# Altium PCB pcbBoard.PcbDoc
Units mm, origin at the board's own origin, x right, y up, seen from the top; angles counter-clockwise.
Board outline 67 x 67 mm, 2 copper layers (Top Layer, Bottom Layer), stack 1.569 mm thick; 46 components, 42 nets, 229 pads, 71 vias.
Unrouted connection lines stored in the file: 1.
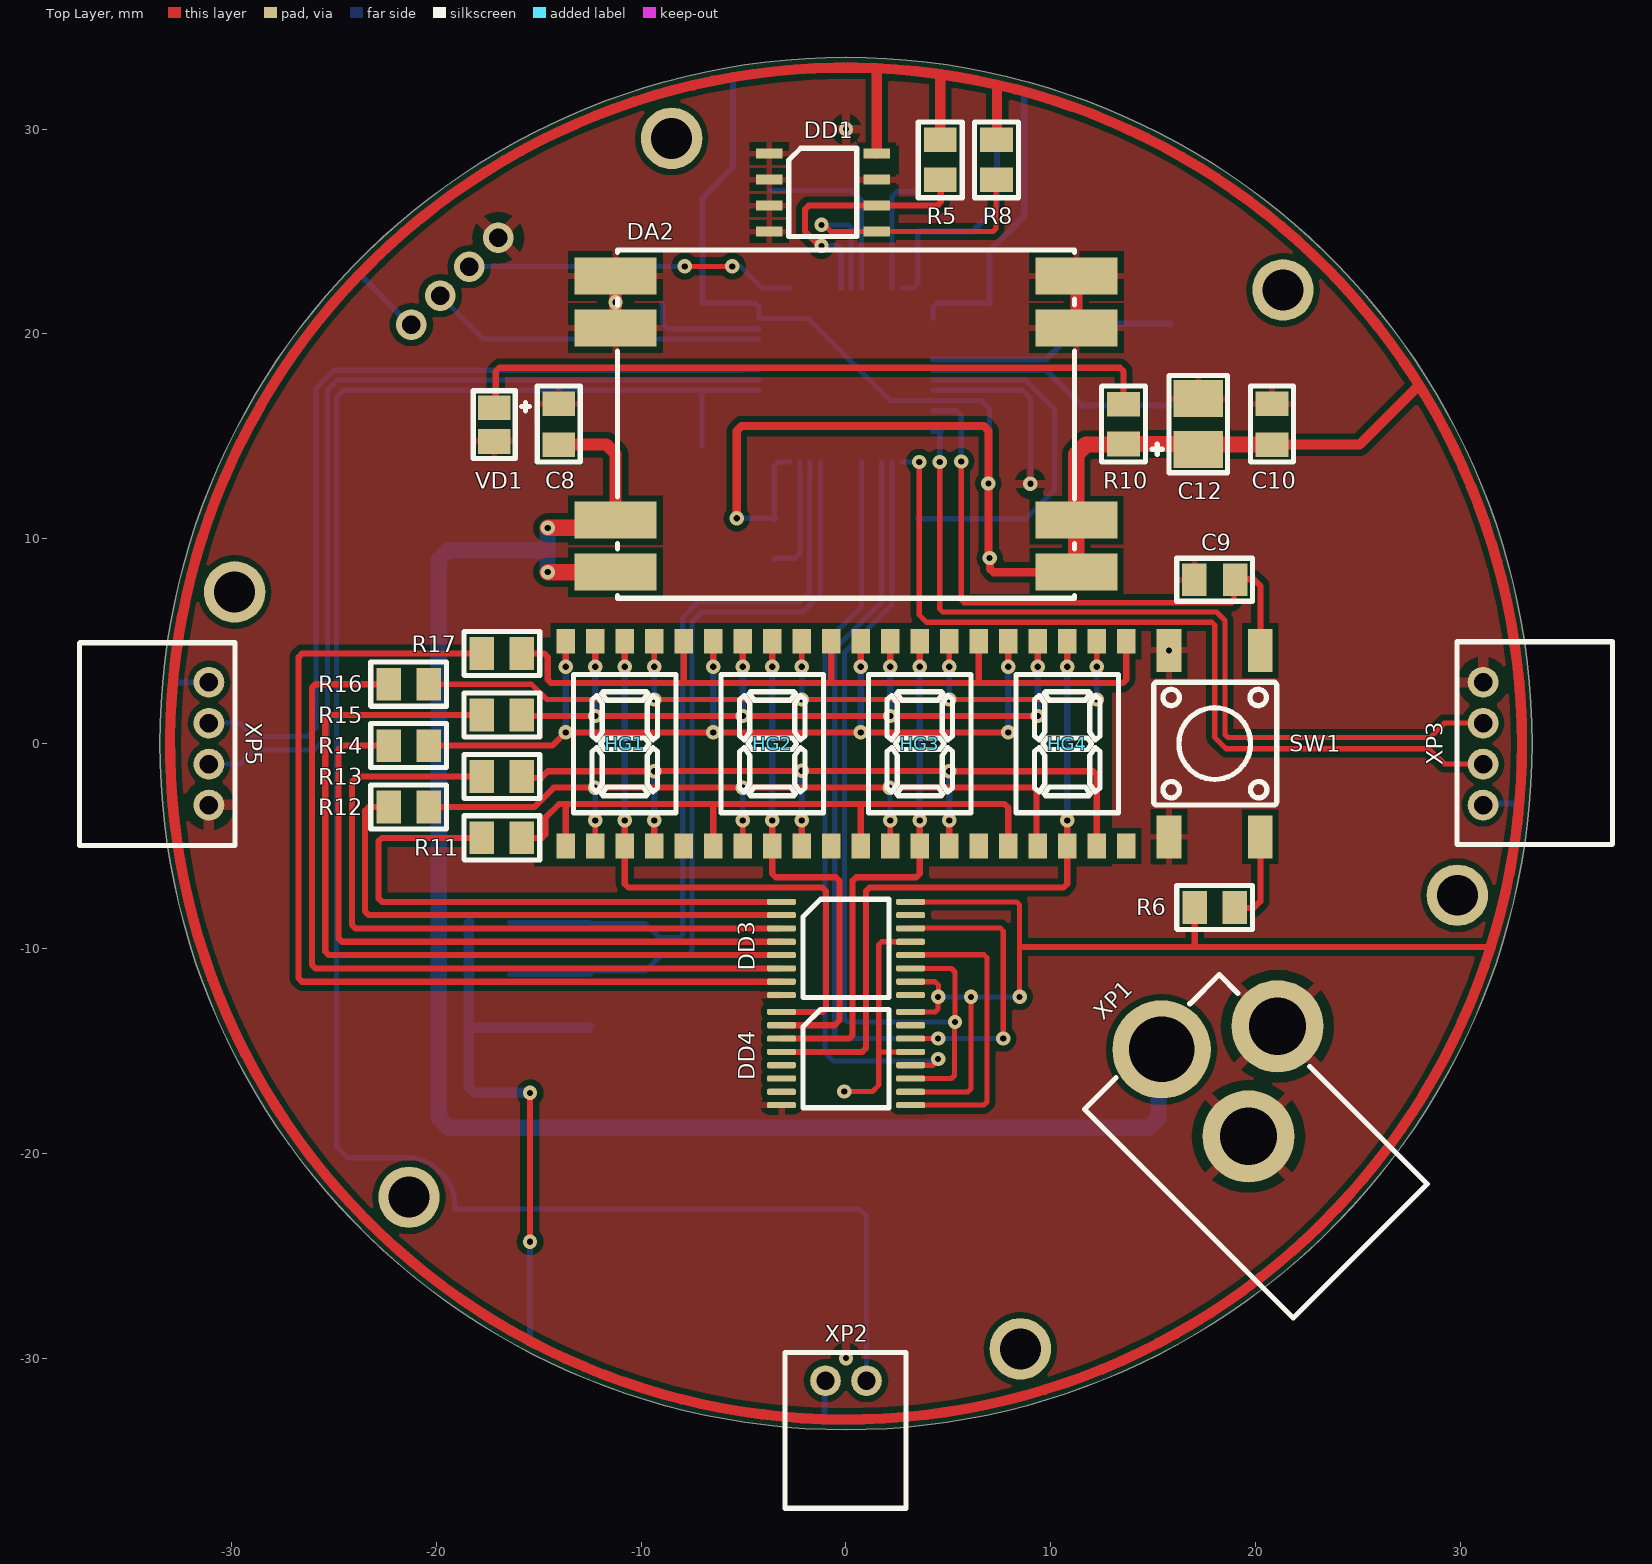
[diagram p0: Top Layer view]
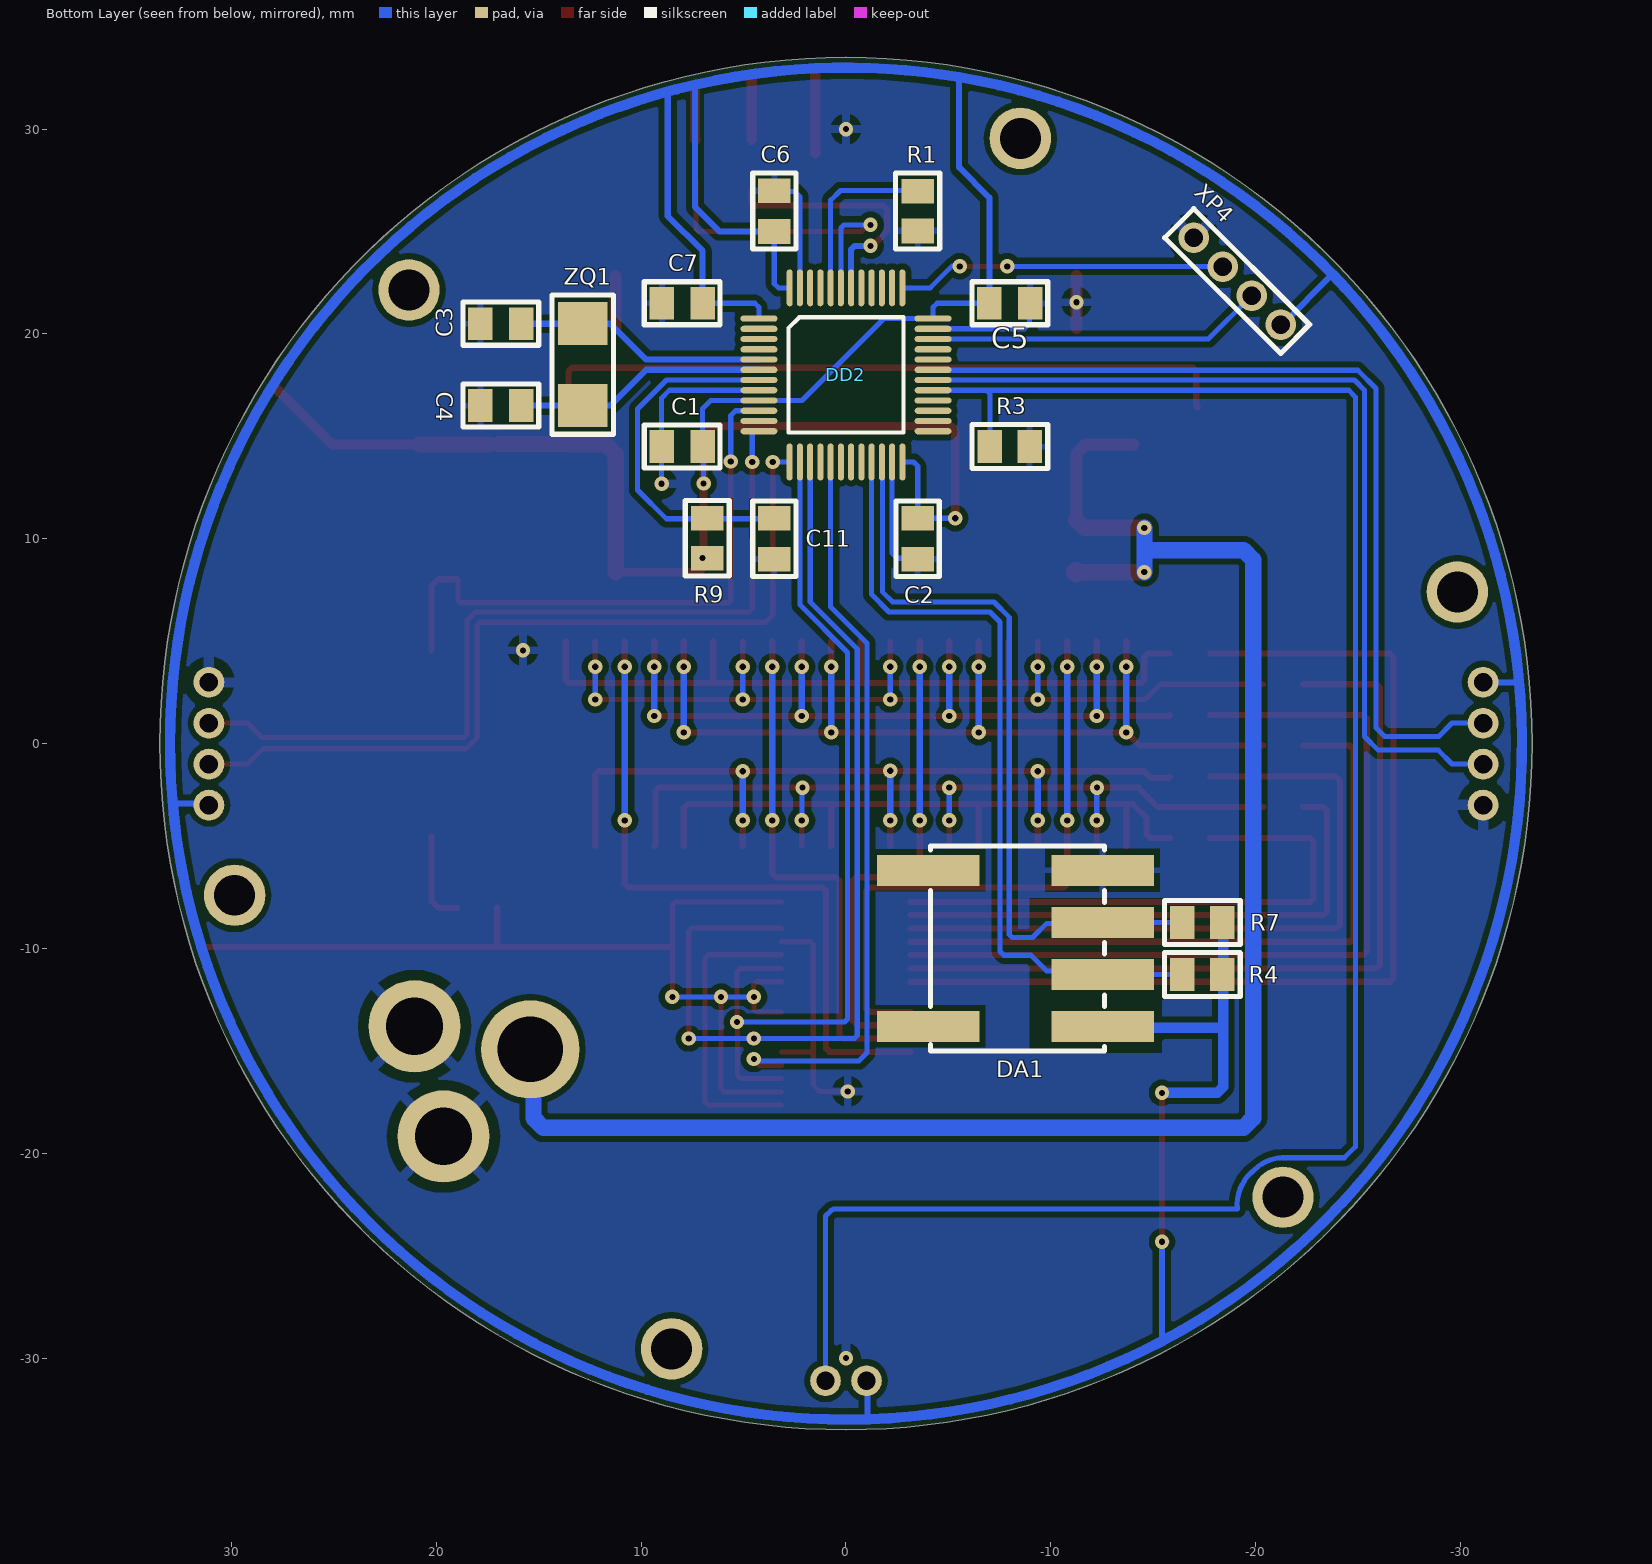
[diagram p1: Bottom Layer view, seen from below]
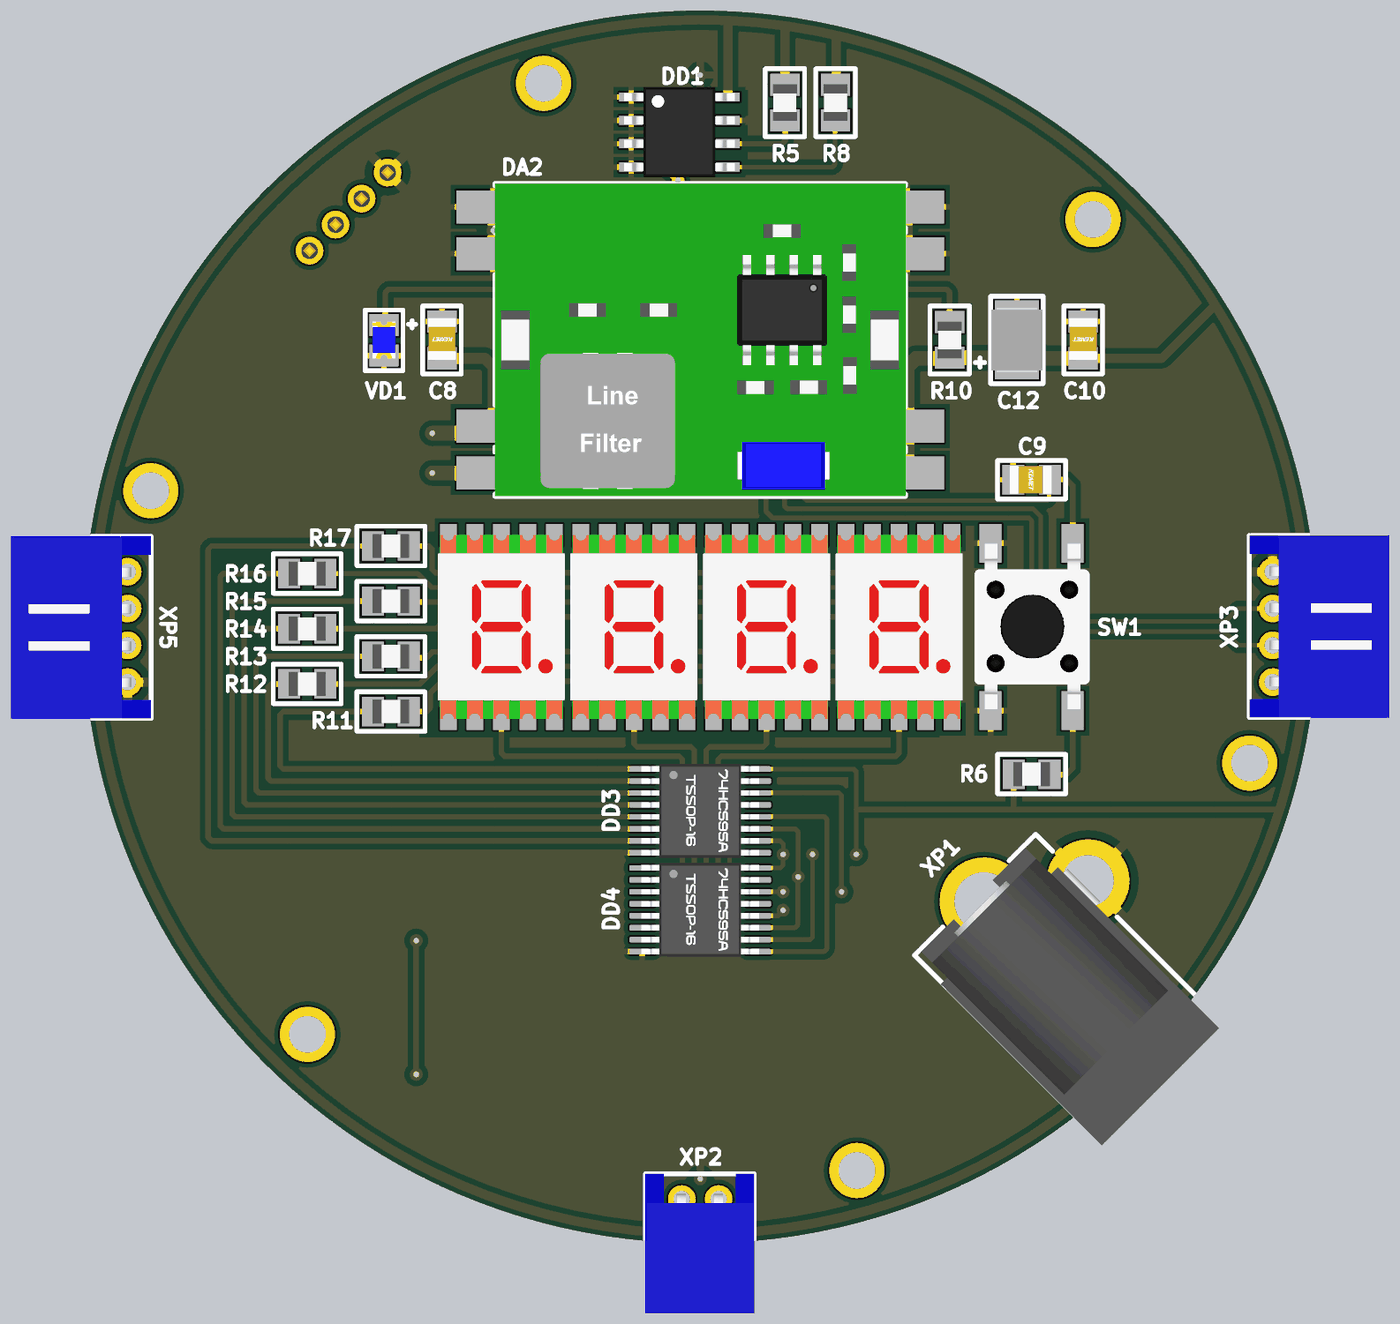
[diagram p2: 3D render of the assembled board from above, using the file's embedded part models]
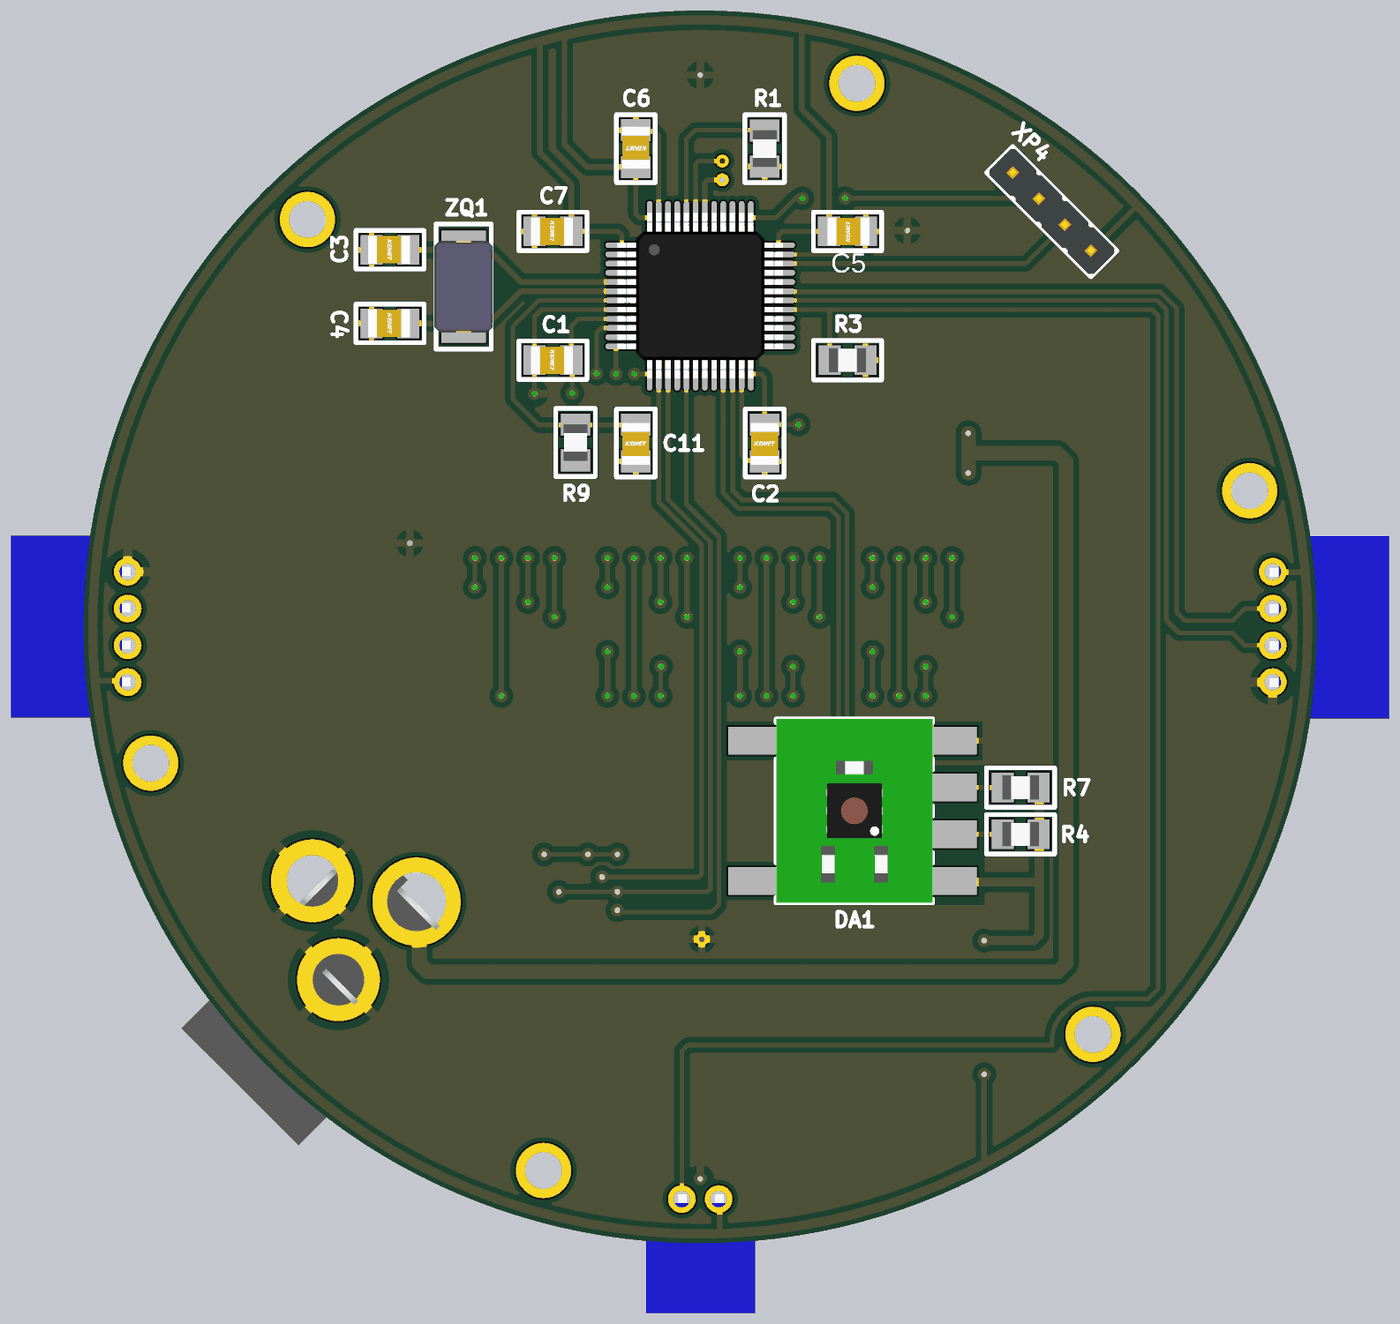
[diagram p3: 3D render of the assembled board from below, using the file's embedded part models]

## Layer stack, top to bottom
Top Solder: solder mask 0.0254, SM-001, Dk 4
Top Layer: signal copper 0.035
Dielectric 1: core 1.4986, Core-043, Dk 4.3
Bottom Layer: signal copper 0.035
Bottom Solder: solder mask 0.0254, SM-001, Dk 4

## Board outline
0,-33.5 cw(c0,0) -33.5,0 cw(c0,0) 0,33.5 cw(c0,0) 33.5,0 cw(c0,0)

## Design rules (kind name [scope] priority, off if disabled: settings)
Clearance [All] p1: gap=0.3 ignorepadtopadclearanceinfootprint=FALSE except(0.2: Arc-Arc Arc-Track Arc-SMDPad Track-Track Track-SMDPad SMDPad-SMDPad)
PolygonConnect [All] p1: thpad.connectstyle=Relief thpad.reliefconductorwidth=0.5 thpad.reliefentries=4 thpad.polygonreliefangle="90 Angle" thpad.airgapwidth=0.5 smdpad.connectstyle=Relief smdpad.reliefconductorwidth=0.3 smdpad.reliefentries=4 smdpad.polygonreliefangle="90 Angle" smdpad.airgapwidth=0.3 via.connectstyle=Relief via.reliefconductorwidth=0.4 via.reliefentries=4 via.polygonreliefangle="90 Angle" via.airgapwidth=0.4
RoutingVias [All] p1: holewidth=0.711 width=1.27 viastyle="Through Hole" minholewidth=0.711 minwidth=1.27 maxholewidth=0.711 maxwidth=1.27
SolderMaskExpansion [All] p1: expansion=0.102 istentingtop=FALSE
Width [All] p1: maxlimit=1 minlimit=0.25 preferedwidth=0.3
30 further rules are at their usual default settings.

## Components (designator, comment, footprint, x,y, rotation, side; value= is the part's Value field where it differs from the comment)
C1 "100nF" 0805#1 8,14.5 r180 bottom
C2 "100nF" 0805#1 -3.5,10 r90 bottom
C3 "22pF" 0805#1 16.85,20.5 r180 bottom
C4 "22pF" 0805#1 16.85,16.5 r180 bottom
C5 "100nF" 0805#1 -8,21.5 r0 bottom
C6 "100nF" 0805#1 3.5,26 r270 bottom
C7 "100nF" 0805#1 8,21.5 r180 bottom
C8 "100nF" 0805#1 -14.025,15.6 r270 top
C9 "100nF" 0805#1 18,8 r0 top
C10 "100nF" 0805#2 20.8,15.6 r270 top
C11 "100nF" 0805#1 3.5,10 r90 bottom
C12 "47uF" smdB 17.2,15.6 r90 top
DA1 "Si7021" Si7021-Board -8.275,-10 r0 bottom
DA2 "MP2363DN" MP2363DN 0,15.6 r0 top
DD1 "FM24CL64B" SOIC-8 -1.125,26.9 r0 top
DD2 "Component_1" QUAD48 0,18 r180 bottom
DD3 "74HC595_L" 74HC595 0,-10 r0 top
DD4 "74HC595_S" 74HC595 0,-15.375 r0 top
HG1 "7-Segment" TOS-F2101AMRL-N-1-HF -10.8,0 r0 top locked
HG2 "7-Segment" TOS-F2101AMRL-N-1-HF -3.6,0 r0 top locked
HG3 "7-Segment" TOS-F2101AMRL-N-1-HF 3.6,0 r0 top locked
HG4 "7-Segment" TOS-F2101AMRL-N-1-HF 10.8,0 r0 top locked
R1 "4.7KОм" "RES: 0.25w" -3.5,26 r270 bottom
R3 "4.7KОм" "RES: 0.25w" -8,14.5 r0 bottom
R4 "4.7KОм" "RES: 0.25w" -17.4,-11.27 r180 bottom
R5 "4.7KОм" "RES: 0.25w" 4.6,28.5 r90 top
R6 "4.7KОм" "RES: 0.25w" 18,-8 r180 top
R7 "4.7KОм" "RES: 0.25w" -17.4,-8.73 r180 bottom
R8 "4.7KОм" "RES: 0.25w" 7.35,28.5 r90 top
R9 "4.7KОм" "RES: 0.25w" 6.775,10.025 r270 bottom
R10 "470Ом" "RES: 0.25w" 13.55,15.6 r90 top
R11 "470Ом" "RES: 0.25w" -16.8,-4.6 r180 top
R12 "470Ом" "RES: 0.25w" -21.35,-3.1 r180 top
R13 "470Ом" "RES: 0.25w" -16.8,-1.6 r180 top
R14 "470Ом" "RES: 0.25w" -21.35,-0.1 r180 top
R15 "470Ом" "RES: 0.25w" -16.8,1.4 r180 top
R16 "470Ом" "RES: 0.25w" -21.35,2.9 r180 top
R17 "470Ом" "RES: 0.25w" -16.8,4.4 r180 top
SW1 "Switch" Button 18,0 r90 top
VD1 "Diode" TO-1608BC-BF -17.175,15.6 r270 top
XP1 "X2" DS-261A 19.65,-19.175 r315 top
XP2 "X2" WB-02 0,-31.1 r0 top
XP3 "X4" WB-04 31.1,0 r90 top
XP4 "X4" PLS-4 -19.1,22.575 r45 bottom
XP5 "X4" WB-04 -31.1,0 r270 top
ZQ1 "HC-49SM" HC-49SM 12.85,18.5 r270 bottom

## Footprints (in the part's own frame and the unit in brackets; to place one, negate y for a bottom-side part, rotate by r counter-clockwise, add the part's x,y. Pads: shape width x height; smd on the part's side, far side on the other; paste and mask are expansions set on the pad)
74HC595 [mm]
  rrect50% 1.4x0.3 smd: 1(-3.15,2.275) 2(-3.15,1.625) 3(-3.15,0.975) 4(-3.15,0.325) 5(-3.15,-0.325) 6(-3.15,-0.975) 7(-3.15,-1.625) 8(-3.15,-2.275) 9(3.15,-2.275) 10(3.15,-1.625) 11(3.15,-0.975) 12(3.15,-0.325) 13(3.15,0.325) 14(3.15,0.975) 15(3.15,1.625) 16(3.15,2.275)
  silkscreen extent -2.1,-2.4 2.1,2.4, body extent -3.2,-2.55 3.2,2.55, height 1.2
0805#1 [mm]
  rect 1.2x1.6 smd mask+0.102: 1(-1,0)
  rect 1.2x1.6 smd: 2(1,0)
  silkscreen extent -1.85,-1.05 1.85,1.05, body extent -1.2,-0.77 1.1,0.78, height 1
0805#2 [mm]
  rect 1.2x1.6 smd: 1(-1,0) 2(1,0)
  silkscreen extent -1.85,-1.05 1.85,1.05, body extent -1.2,-0.78 1.1,0.78, height 1
Button [mm]
  rect 2.1x1.2 smd: 1(-4.55,2.23) 1(4.55,2.23) 2(-4.55,-2.23) 2(4.55,-2.23)
  silkscreen extent -3,-3.02 3,2.98, body extent -4.47,-3.04 4.53,2.96, height 9.5
DS-261A [mm]
  round 4.8 hole 3.2: 1(-6,0)
  round 4.5 hole 2.8: 2(-2.8,4.8) 2(0,0)
  silkscreen extent -6.6,-4.73 7.81,4.58, body extent -6.5,-4.84 7.9,4.46, height 11.1
HC-49SM [mm]
  rect 2.1x2.4 smd: 1(-2,0) 2(2,0)
  silkscreen extent -3.4,-1.5 3.4,1.5, body extent -2.5,-1.6 2.5,1.6, height 1.3
MP2363DN [mm]
  rect 4x1.8 smd: 1(-11.25,-7.23) 1(-11.25,-4.69) 2(-11.25,4.69) 2(-11.25,7.23) 3(11.25,-7.23) 3(11.25,-4.69) 4(11.25,4.69) 4(11.25,7.23)
  silkscreen extent -11.15,-8.5 11.15,8.5, body extent -11.15,-8.5 11.15,8.5, height 5.8
PLS-4 [mm]
  round 1.5 hole 0.9: 1(-3,0) 2(-1,0) 3(1,0) 4(3,0)
  silkscreen extent -4,-1 4,1, body extent -4,-1 4,1, height 6
QUAD48 [mm]
  oval 1.8x0.3 smd: 1(-4.25,2.75) 2(-4.25,2.25) 3(-4.25,1.75) 4(-4.25,1.25) 5(-4.25,0.75) 6(-4.25,0.25) 7(-4.25,-0.25) 8(-4.25,-0.75) 9(-4.25,-1.25) 10(-4.25,-1.75) 11(-4.25,-2.25) 12(-4.25,-2.75) 25(4.25,-2.75) 26(4.25,-2.25) 27(4.25,-1.75) 28(4.25,-1.25) 29(4.25,-0.75) 30(4.25,-0.25) 31(4.25,0.25) 32(4.25,0.75) 33(4.25,1.25) 34(4.25,1.75) 35(4.25,2.25) 36(4.25,2.75)
  oval 0.3x1.8 smd: 13(-2.75,-4.25) 14(-2.25,-4.25) 15(-1.75,-4.25) 16(-1.25,-4.25) 17(-0.75,-4.25) 18(-0.25,-4.25) 19(0.25,-4.25) 20(0.75,-4.25) 21(1.25,-4.25) 22(1.75,-4.25) 23(2.25,-4.25) 24(2.75,-4.25) 37(2.75,4.25) 38(2.25,4.25) 39(1.75,4.25) 40(1.25,4.25) 41(0.75,4.25) 42(0.25,4.25) 43(-0.25,4.25) 44(-0.75,4.25) 45(-1.25,4.25) 46(-1.75,4.25) 47(-2.25,4.25) 48(-2.75,4.25)
  silkscreen extent -2.81,-2.81 2.81,2.81, body extent -4.5,-4.5 4.5,4.5, height 1.5
"RES: 0.25w" [mm]
  rect 1.2x1.6 smd: 1(-0.975,0) 2(0.975,0)
  silkscreen extent -1.85,-1.07 1.85,1.07, body extent -1,-0.65 1,0.65, height 0.73
Si7021-Board [mm]
  rect 5x1.5 smd: 1(-4.25,3.81) 2(-4.25,1.27) 3(-4.25,-1.27) 4(-4.25,-3.81) 5(4.25,3.81) 6(4.25,-3.81)
  silkscreen extent -4.35,-5 4.15,5, body extent -4.35,-5 4.15,5, height 2.36
smdB [mm]
  rect 1.8x2.4 smd: 1(-1.25,0) 2(1.25,0)
  silkscreen extent -2.37,-1.43 2.37,2.25, body extent -1.75,-1.4 1.75,1.4, height 2
SOIC-8 [mm]
  rect 1.3x0.5 smd: 1(-2.631,1.905) 2(-2.631,0.635) 3(-2.631,-0.635) 4(-2.631,-1.905) 5(2.631,-1.905) 6(2.631,-0.635) 7(2.631,0.635) 8(2.631,1.905)
  silkscreen extent -1.67,-2.15 1.65,2.17, body extent -3,-2.45 3,2.45, height 1.75
TO-1608BC-BF [mm]
  rect 1.2x1.6 smd: 1(-0.8,0) 2(0.85,0)
  silkscreen extent -1.63,-1.02 1.68,1.73, body extent -1,-0.63 1,0.62, height 1.1
TOS-F2101AMRL-N-1-HF [mm]
  rect 0.9x1.2 smd: 1(-2.88,-5) 2(-1.44,-5) 3(0,-5) 3(0,5) 4(1.44,-5) 5(2.88,-5) 6(-2.88,5) 7(-1.44,5) 9(1.44,5) 10(2.88,5)
  silkscreen extent -2.5,-3.37 2.5,3.37, body extent -3.45,-5 3.45,5, height 3.75
WB-02 [mm]
  round 1.5 hole 0.9: 1(-1,0) 2(1,0)
  silkscreen extent -2.98,-6.22 2.93,1.38, body extent -2.98,-6.23 2.93,1.37, height 4.8
WB-04 [mm]
  round 1.5 hole 0.9: 1(-3,0) 2(-1,0) 3(1,0) 4(3,0)
  silkscreen extent -4.92,-6.32 4.97,1.28, body extent -4.92,-6.32 4.97,1.27, height 4.9

## Part data
C1 C2 C5 C6 C7 C8 C9 C10 C11: library part "CAP: 100nF"
C3 C4: library part "CAP: 22pF"
C12: library part "ECAP: 47uF 10V"
R1 R3 R4 R5 R6 R7 R8 R9 R10 R11 R12 R13 R14 R15 R16 R17: library part Resistor

## Free pads (board coordinates)
  round 3 hole 2: 1(-29.846,7.403) 1(-21.334,-22.146) 1(-8.512,29.548) 1(8.512,-29.548) 1(21.334,22.146) 1(29.846,-7.403)

## Via types
v1: diameter 0.7, hole 0.3, Top Layer to Bottom Layer, tented both sides, 68 vias
v2: diameter 0.7, hole 0.3, Top Layer to Bottom Layer, 3 vias

## Nets (pads, with @x,y where several pads share a name; then routed paths per layer and width w, separated by ;. In a path a pad name is that pad's centre, name@x,y a point inside that pad or via, vN(x,y) a via of type N, cw(c..) or ccw(c..) an arc to the next point about the centre after c; other vN are vias at no path point)
+3.3V: C1.2 C2.2 C5.2 C6.2 C7.2 C10.2 C12.1 DA1.1 DA2.3 DD1.8 DD2.1 DD2.9 DD2.24 DD2.36 DD2.48 DD3.10 DD3.16 DD4.10 DD4.16 R4.2 R5.2 R6.2 R7.2 R8.2 R9.2 R10.1 XP2.1 XP3.1 XP4.1 XP5.1 | length 629.2
  Top Layer w0.25: DD4.10 5.954,-17 6.1,-16.854 v1(6.1,-12.365) ; DD4.16 4.354,-13.1 4.5,-12.954 v1(4.5,-12.365) ; DD3.10 4.35,-11.625 4.525,-11.8 v1@4.525,-12.275 ; DD3.16 8.329,-7.725 8.475,-7.871 v1(8.475,-12.365) ; 17.025,-9.921 17.033,-9.929
  Top Layer w0.3: v1(-15.425,-24.32) -15.434,-24.311 -15.434,-17.059 v1(-15.425,-17.05) ; 8.491,-9.929 17.033,-9.929 31.471,-9.929 ; 17.025,-9.921 R6.2
  Top Layer w0.4: v1(-5.337,11) -5.337,15.267 -5.103,15.501 6.727,15.501 6.961,15.267 6.961,9.058 7.032,8.987 7.032,8.534 7.195,8.37 DA2.3@11.25,8.37
  Top Layer w0.5: DD1.8 1.506,32.944 1.482,32.967 ; R5.2 4.6,32.675 ; R8.2 7.375,29.5 7.375,32.125 ; C10.2 25.075,14.6 27.95,17.475 ; 1.482,32.967 ccw(c0,0) -15.466,-29.151 ccw(c0,0) 31.471,-9.929 ccw(c0,0) 33,0 ccw(c0,0) 27.714,17.914 ccw(c0,0) 1.482,32.967
  Top Layer w0.8: DA2.3@11.25,8.37 11.25,10.91 11.25,14.131 11.719,14.6 13.525,14.6 R10.1 C12.1@16.925,14.625 ; C12.1@17.45,14.6 C10.2
  Bottom Layer w0.25: C5.2 -4.45,21.5 -4.25,21.3 DD2.36@-4.25,20.863 ; v1(-5.337,11) C2.2 -3.5,13.55 -3.3,13.75 DD2.24 ; DD2.36 -1.85,20.75 2.15,16.75 DD2.9 6.6,16.75 7,16.35 C1.2 6.95,14.45 v1(6.95,12.7) ; DD2.48 3.3,22.25 3.5,22.45 C6.2 ; DD2.1 4.25,21.3 4.45,21.5 C7.2 ; v1(4.5,-12.365) v1(6.1,-12.365) v1(8.475,-12.365) ; R9.2 R9.2@6.8,9.025
  Bottom Layer w0.3: -32.864,2.975 XP5.1@-31.125,2.975 ; -23.751,22.911 XP4.1@-21.293,20.454 ; v1@-15.651,-24.32 -15.421,-24.55 -15.421,-29.175 ; C5.2 -7,26.65 -5.519,28.131 -5.519,32.535 ; -1.05,-32.983 XP2.1@-1.05,-31.15 ; C6.2 6.175,25 7.375,26.2 7.375,32.075 ; C7.2 7,24.05 8.7,25.75 8.7,31.675 ; XP3.1@31.175,-2.925 32.87,-2.925
  Bottom Layer w0.5: XP5.1@-31.125,2.975 XP5.1 ; XP4.1@-21.293,20.454 XP4.1 ; R7.2 -18.415,-8.77 -18.415,-11.23 R4.2 -18.415,-11.31 -18.415,-13.87 ; v1(-15.425,-17.05) -18.122,-17.05 -18.415,-16.757 -18.415,-13.87 ; DA1.1 -12.585,-13.87 -18.415,-13.87 ; XP2.1@-1.05,-31.15 XP2.1 ; XP3.1 XP3.1@31.175,-2.925 ; -23.751,22.911 ccw(c0,0) -15.466,-29.151 ccw(c0,0) 31.471,-9.929 ccw(c0,0) 33,0 ccw(c0,0) 27.714,17.914 ccw(c0,0) 1.482,32.967 ccw(c0,0) -5.519,32.535 ccw(c0,0) -23.751,22.911
  other v1: 7.012,9.058
BOOT0: DD2.44 R1.1 | length 8.9
  Bottom Layer w0.25: R1.1@-3.693,27 0.275,27 0.75,26.525 DD2.44
DS: DD2.17 DD4.12 | length 36.7
  Top Layer w0.25: DD4.12 4.251,-15.7 4.451,-15.5 v1@4.5,-15.5
  Bottom Layer w0.25: DD2.17 0.75,6.675 -1.025,4.9 -1.025,-15.098 -0.623,-15.5 2.114,-15.5 v1@4.5,-15.5
  other v1: 4.5,-15.4
GND: C1.1 C2.1 C3.1 C4.1 C5.1 C6.1 C7.1 C8.1 C9.1 C10.1 C11.1 C12.2 DA1.4 DA2.2 DA2.4 DD1.1 DD1.2 DD1.3 DD1.4 DD1.7 DD2.8 DD2.23 DD2.35 DD2.47 DD3.8 DD3.13 DD4.8 DD4.13 R1.2 R3.1 SW1.1 VD1.2 XP1.2 XP3.4 XP4.4 XP5.4 | length 43.5
  Top Layer w0.25: v2(-0.088,-16.981) 1.294,-16.981 1.6,-16.675 1.6,-15.055 ; DD4.13 1.605,-15.05 1.6,-15.055 ; DD3.13 1.746,-9.675 1.6,-9.821 1.6,-15.055
  Top Layer w0.6: DA2.2@-11.25,20.29 DA2.2@-11.25,22.83 ; DA2.4@11.25,20.29 DA2.4@11.25,22.83
  Bottom Layer w0.25: C5.1 -8.95,21.45 -8.95,20.5 -8.7,20.25 DD2.35 ; C2.1 -3.45,9.05 -2.5,9.05 -2.25,9.3 DD2.23 ; DD2.47 2.25,26.7 2.5,26.95 3.45,26.95 C6.1 ; DD2.8 8.625,17.25 9,16.875 9,12.72 v1@8.969,12.689
  other v1: 0,-30 15.77,4.55 9,12.689 -11.25,21.546 0,30
NetC8_2: C8.2 DA2.1 XP1.1 | length 86.8
  Top Layer w0.6: C8.2 -11.7,14.6 -11.25,14.15 DA2.1@-11.25,10.91
  Top Layer w0.8: v1(-14.558,8.37) DA2.1@-11.251,8.371 ; v1(-14.558,10.531) -14.553,10.536 -11.624,10.536 DA2.1@-11.25,10.91
  Bottom Layer w0.8: v1@-14.575,8.37 -14.575,9.45 ; v1@-14.575,10.531 -14.575,9.45 ; XP1.1 15.256,-15.084 15.256,-18.281 14.787,-18.75 -19.406,-18.75 -19.875,-18.281 -19.875,8.98 -19.406,9.449 -14.577,9.449 -14.575,9.45
NetDD3_1: DD3.1 R11.2 | length 27.6
  Top Layer w0.3: R11.2 -22.649,-4.6 -22.825,-4.776 -22.825,-7.549 -22.649,-7.725 DD3.1
NetDD3_2: DD3.2 R12.2 | length 26.5
  Top Layer w0.3: R12.2 -23.299,-3.1 -23.475,-3.276 -23.475,-8.199 -23.299,-8.375 DD3.2
NetDD3_3: DD3.3 R13.2 | length 34.5
  Top Layer w0.3: R13.2 -23.875,-1.6 -24.125,-1.85 -24.125,-8.849 -23.949,-9.025 DD3.3
NetDD3_4: DD3.4 R14.2 | length 33.4
  Top Layer w0.3: R14.2 -24.599,-0.1 -24.775,-0.276 -24.775,-9.499 -24.599,-9.675 DD3.4
NetDD3_5: DD3.5 R15.2 | length 41.4
  Top Layer w0.3: R15.2 -25.249,1.4 -25.425,1.224 -25.425,-10.149 -25.249,-10.325 DD3.5
NetDD3_6: DD3.6 R16.2 | length 40.3
  Top Layer w0.3: R16.2 -25.899,2.9 -26.075,2.724 -26.075,-10.799 -25.899,-10.975 DD3.6
NetDD3_7: DD3.7 R17.2 | length 48.3
  Top Layer w0.3: R17.2 -26.549,4.4 -26.725,4.224 -26.725,-11.449 -26.549,-11.625 DD3.7
NetDD3_12: DD3.12 DD4.9 | length 14.6
  Top Layer w0.254: DD4.9 6.728,-17.65 6.877,-17.501 6.877,-10.458 6.728,-10.309 3.166,-10.309 DD3.12
NetDD4_1: DD4.1 HG1.3 | length 29.8
  Top Layer w0.3: v1(-10.8,-3.75) -10.8,-5 -10.8,-6.849 -10.624,-7.025 -1.151,-7.025 -0.975,-7.201 -0.975,-12.924 -1.151,-13.1 DD4.1 ; v1(-10.8,3.75) HG1.3@-10.8,5
  Bottom Layer w0.3: v1(-10.8,-3.75) v1(-10.8,3.75)
NetDD4_2: DD4.2 HG2.3 | length 24.5
  Top Layer w0.3: v1(-3.6,-3.75) -3.6,-5 -3.6,-6.349 -3.424,-6.525 -0.501,-6.525 -0.325,-6.701 -0.325,-13.518 -0.557,-13.75 DD4.2 ; v1(-3.6,3.75) HG2.3@-3.6,5
  Bottom Layer w0.3: v1(-3.6,-3.75) v1(-3.6,3.75)
NetDD4_3: DD4.3 HG3.3 | length 25.8
  Top Layer w0.3: DD4.3 0.149,-14.4 0.325,-14.224 0.325,-6.699 0.501,-6.523 3.424,-6.523 3.6,-6.347 3.6,-5 v1(3.6,-3.75) ; v1(3.6,3.75) HG3.3@3.6,5
  Bottom Layer w0.3: v1(3.6,-3.75) v1(3.6,3.75)
NetDD4_4: DD4.4 HG4.3 | length 33.7
  Top Layer w0.3: DD4.4 0.799,-15.05 0.975,-14.874 0.975,-7.201 1.151,-7.025 10.624,-7.025 10.8,-6.849 10.8,-5 v1(10.8,-3.75) ; v1(10.8,3.75) HG4.3@10.8,5
  Bottom Layer w0.3: v1(10.8,-3.75) v1(10.8,3.75)
NetHG1_1: HG1.1 HG2.1 HG3.1 HG4.1 R11.1 | length 33
  Top Layer w0.3: R11.1 -14.851,-4.6 -14.675,-4.424 -14.675,-3.614 -14.011,-2.95 -13.625,-2.95 ; HG1.1 -13.68,-3.005 -13.625,-2.95 ; HG2.1 -6.48,-3.005 -6.425,-2.95 ; HG3.1 0.72,-2.955 0.725,-2.95 ; HG4.1 7.92,-3.126 7.744,-2.95 0.725,-2.95 ; -13.625,-2.95 -6.425,-2.95 ; -6.425,-2.95 0.725,-2.95
NetHG1_2: HG1.2 HG2.2 HG3.2 HG4.2 R12.1 | length 41.5
  Top Layer w0.254: HG1.2 v1(-12.24,-3.75) ; HG2.2 v1(-5.04,-3.75) ; HG3.2 v1(2.16,-3.75)
  Top Layer w0.3: R12.1 -15.225,-3.1 -14.275,-2.15 v1(-12.25,-2.15) v1(-5.04,-2.15) v1(2.125,-2.15) 9.151,-2.15 9.3,-2.299 9.3,-4.94 HG4.2
  Bottom Layer w0.254: v1(-12.25,-2.15) -12.245,-2.155 -12.245,-3.745 v1(-12.24,-3.75) ; v1(-5.04,-3.75) v1(-5.04,-2.15) ; v1@2.125,-3.89 v1@2.16,-3.925 ; v1(2.125,-2.15) 2.143,-2.168 2.143,-3.732 v1(2.16,-3.75)
NetHG1_4: HG1.4 HG2.4 HG3.4 HG4.4 R13.1 | length 42.8
  Top Layer w0.3: R13.1 -15.75,-1.675 -14.875,-1.675 -14.55,-1.35 v1(-9.36,-1.35) -9.347,-1.338 -2.173,-1.338 v1(-2.16,-1.325) -2.148,-1.338 5.028,-1.338 v1(5.04,-1.35) 12.064,-1.35 12.24,-1.526 HG4.4 ; HG1.4 v1(-9.36,-3.75) ; HG2.4 v1(-2.16,-3.75) ; HG3.4 v1(5.04,-3.75)
  Bottom Layer w0.3: v1(-9.36,-3.75) v1(-9.36,-1.35) ; v1(-2.16,-3.75) v1(-2.16,-1.325) ; v1(5.04,-3.75) v1(5.04,-1.35)
NetHG1_6: HG1.6 HG2.6 HG3.6 HG4.6 R14.1 | length 46.4
  Top Layer w0.3: R14.1 -14.33,-0.1 v1(-13.68,0.55) v1(-6.48,0.55) v1(0.72,0.55) v1(7.92,0.55) ; v1(-13.68,3.75) HG1.6 ; v1(-6.48,3.75) HG2.6 ; v1(0.72,3.75) HG3.6 ; v1(7.92,3.75) HG4.6
  Bottom Layer w0.3: v1(-13.68,0.55) v1(-13.68,3.75) ; v1(-6.48,0.55) v1(-6.48,3.75) ; v1(0.72,0.55) v1(0.72,3.75) ; v1(7.92,0.55) v1(7.92,3.75)
NetHG1_7: HG1.7 HG2.7 HG3.7 HG4.7 R15.1 | length 39.8
  Top Layer w0.3: R15.1 -15.775,1.35 v1(-12.24,1.35) v1(-5.04,1.35) v1(2.16,1.35) v1(9.36,1.35) ; v1(-12.24,3.75) HG1.7 ; v1(-5.04,3.75) HG2.7 ; v1(2.16,3.75) HG3.7 ; v1(9.36,3.75) HG4.7
  Bottom Layer w0.3: v1(-12.24,1.35) v1(-12.24,3.75) ; v1(-5.04,1.35) v1(-5.04,3.75) ; v1(2.16,1.35) v1(2.16,3.75) ; v1(9.36,1.35) v1(9.36,3.75)
NetHG1_9: HG1.9 HG2.9 HG3.9 HG4.9 R16.1 | length 44.3
  Top Layer w0.254: R16.1 -15.35,2.9 -14.6,2.15 v1(-9.36,2.15) v1(-2.16,2.15) v1(5.04,2.15) v1(12.24,2.15) ; v1(-9.36,3.75) HG1.9 ; v1(-2.16,3.75) HG2.9 ; v1(5.04,3.75) HG3.9 ; v1(12.24,3.75) HG4.9
  Bottom Layer w0.254: v1(-9.36,2.15) v1(-9.36,3.75) ; v1(-2.16,2.15) v1(-2.16,3.75) ; v1(5.04,2.15) v1(5.04,3.75) ; v1(12.24,2.15) v1(12.24,3.75)
NetHG1_10: HG1.10 HG2.10 HG3.10 HG4.10 R17.1 | length 38.9
  Top Layer w0.3: R17.1 -14.738,4.4 -14.562,4.224 -14.562,3.126 -14.386,2.95 -7.925,2.95 ; HG1.10 -7.92,2.955 -7.925,2.95 ; HG2.10 -0.72,2.955 -0.725,2.95 ; HG3.10 6.48,2.995 6.525,2.95 ; HG4.10 13.68,3.126 13.504,2.95 6.525,2.95 ; -7.925,2.95 -0.725,2.95 ; -0.725,2.95 6.525,2.95
NetR10_2: R10.2 VD1.1 | length 34.2
  Top Layer w0.3: VD1.1 -17.1,16.475 -17.1,18.174 -16.924,18.35 13.374,18.35 13.55,18.174 R10.2
NRST: C11.2 DD2.7 R9.1 | length 17.7
  Bottom Layer w0.25: C11.2@3.5,10.975 6.775,10.975 8.771,10.975 10.175,12.379 10.175,16.336 8.761,17.75 DD2.7
PA0: C9.2 DD2.10 R6.1 SW1.2 | length 34
  Top Layer w0.25: v1(5.625,13.776) 5.625,7.45 5.625,7.021 5.771,6.875 18.854,6.875 18.95,6.971 18.95,7.975 C9.2@19,8.025
  Top Layer w0.3: R6.1 19,-8.025 19.9,-8.025 20.23,-7.695 SW1.2@20.23,-4.55 ; C9.2@19,8.025 19.9,8.025 20.23,7.695 SW1.2@20.23,4.55
  Bottom Layer w0.25: DD2.10 5.389,16.25 5.625,16.014 v1(5.625,13.776)
PA8: DD2.29 R3.2 XP2.2 | length 95.9
  Bottom Layer w0.25: -21.284,-20.222 cw(c-21.334,-22.146) -19.964,-20.793 cw(c-21.241,-22.517) -19.097,-22.479 cw(c-21.241,-22.517) -19.106,-22.725 0.609,-22.725 0.708,-22.773 0.737,-22.803 1,-23.066 XP2.2 ; -21.284,-20.221 -24.329,-20.221 -24.867,-19.683 -24.867,16.925 -24.542,17.25 -6.858,17.25 ; R3.2 -7.025,17.083 -6.858,17.25 ; DD2.29 -6.858,17.25
PB6: DD1.6 DD2.42 R5.1 | length 12.4
  Top Layer w0.3: v2(-1.2,24.3) -1.306,24.3 -2,24.994 -2,26.089 -1.824,26.265 DD1.6 4.449,26.265 4.625,26.441 4.625,27 R5.1@4.6,27.025
  Bottom Layer w0.3: v2(-1.2,24.3) -0.426,24.3 -0.25,24.124 DD2.42
PB7: DD1.5 DD2.43 R8.1 | length 15.6
  Top Layer w0.25: v2(-1.2,25.325) -1.078,25.325 -0.748,24.995 DD1.5 7.179,24.995 7.325,25.141 7.325,27.5 R8.1
  Bottom Layer w0.25: v2(-1.2,25.325) 0.1,25.325 0.25,25.175 DD2.43
PD0: C3.2 DD2.5 ZQ1.1 | length 12.3
  Bottom Layer w0.3: DD2.5 9.75,18.75 11.5,20.5 ZQ1.1 C3.2
PD1: C4.2 DD2.6 ZQ1.2 | length 12.3
  Bottom Layer w0.3: DD2.6 9.75,18.25 11.5,16.5 ZQ1.2 C4.2
SCL: DA1.2 DD2.21 R4.1 | length 38.7
  Bottom Layer w0.25: R4.1 DA1.2 -12.354,-11.099 -9.796,-11.099 -9.031,-10.333 -7.707,-10.333 -7.517,-10.143 -7.517,5.942 -7.029,6.431 -2.106,6.431 -1.25,7.286 DD2.21
SDA: DA1.3 DD2.22 R7.1 | length 37.4
  Bottom Layer w0.25: R7.1 DA1.3 -12.482,-8.773 -9.796,-8.773 -9.107,-9.463 -8.114,-9.463 -7.967,-9.316 -7.967,6.164 -7.224,6.907 -2.281,6.907 -1.775,7.414 -1.775,12.94 -1.76,12.955 -1.76,13.74 DD2.22
SH: DD2.15 DD3.14 DD4.14 | length 48.3
  Top Layer w0.254: DD4.14 v1@4.423,-14.4 ; DD3.14 3.166,-9.009 7.526,-9.009 7.675,-9.158 v1(7.675,-14.4)
  Bottom Layer w0.254: DD2.15 1.75,6.925 -0.55,4.625 -0.55,-14.251 -0.401,-14.4 v1(4.5,-14.4) v1(7.675,-14.4)
ST: DD2.14 DD3.11 DD4.11 | length 43.1
  Top Layer w0.254: DD4.11 5.152,-16.35 5.301,-16.201 5.301,-14.072 5.299,-14.07 v1@5.299,-13.623 ; DD3.11 3.152,-10.973 5.15,-10.973 5.323,-11.146 5.323,-13.591 v1(5.325,-13.593)
  Bottom Layer w0.25: DD2.14 2.25,6.775 -0.075,4.45 -0.075,-13.447 0.071,-13.593 v1(5.325,-13.593)
SWCLK: DD2.37 XP4.3 | length 16.1
  Top Layer w0.25: v1(-7.875,23.3) v1(-5.55,23.3)
  Bottom Layer w0.25: XP4.3 -18.375,23.3 v1(-7.875,23.3) ; v1(-5.55,23.3) -5.525,23.325 -5.189,23.325 -4.114,22.25 DD2.37
SWDIO: DD2.34 XP4.2 | length 16.4
  Bottom Layer w0.25: XP4.2 -17.689,19.75 DD2.34
USART1_RX: DD2.31 XP5.2 | length 44.2
  Bottom Layer w0.25: XP5.2 -30.98,1 -29.591,1 -28.943,0.352 -26.299,0.352 -25.875,0.776 -25.875,17.331 -24.981,18.225 -5.06,18.225 -5.045,18.24 -4.26,18.24 DD2.31
USART1_TX: DD2.30 XP5.3 | length 44.5
  Bottom Layer w0.25: XP5.3 -29.591,-1 -28.911,-0.32 -25.987,-0.32 -25.317,0.35 -25.317,17.252 -24.819,17.75 DD2.30
USART2_RX: DD2.13 XP3.2 | length 41.4
  Top Layer w0.25: v1(3.575,13.75) 3.575,6.275 3.925,5.925 17.854,5.925 18,5.779 18,0.3 18.55,-0.25 28.469,-0.25 29.219,-1 XP3.2@30.496,-1
  Bottom Layer w0.25: DD2.13 v1(3.575,13.75)
USART2_TX: DD2.12 XP3.3 | length 41.7
  Top Layer w0.25: v1(4.575,13.75) 4.575,6.571 4.721,6.425 18.085,6.425 18.5,6.01 18.5,0.446 18.646,0.3 28.519,0.3 29.219,1 XP3.3
  Bottom Layer w0.25: DD2.12 4.602,15.25 4.625,15.227 4.575,15.177 v1(4.575,13.75)
pads on no net: DA1.5 DA1.6 DD2.2 DD2.3 DD2.4 DD2.11 DD2.16 DD2.18 DD2.19 DD2.20 DD2.25 DD2.26 DD2.27 DD2.28 DD2.32 DD2.33 DD2.38 DD2.39 DD2.40 DD2.41 DD2.45 DD2.46 DD3.9 DD3.15 DD4.5 DD4.6 DD4.7 DD4.15 HG1.5 HG2.5 HG3.5 HG4.5

## Polygon pours and split planes (outlines as drawn)
no net on Top Layer "NONET_L01_P002" (solid, pour order 2): 17.3,-47.425
no net on Top Layer "NONET_L01_P001" (solid, pour order 1): -153.05,0.925
GND on Top Layer "GND_L01_P000" (solid, pour order 0): -33.5,0 cw(c0,0) 0,33.5 cw(c0,0) 33.5,0 cw(c0,0) 0,-33.5 cw(c0,0)
GND on Bottom Layer "GND_L02_P003" (solid, pour order 3): -33.5,0 cw(c-0.094,-0.053) 0,33.5 cw(c-0.094,-0.053) 33.5,0 cw(c-0.094,-0.053) 0,-33.5 cw(c-0.094,-0.053)

## Other copper
Top Layer:
  pour cut-out: 0.4,29.2 2.575,29.2 2.6,29.175 2.6,27.775 0.4,27.775
  pour cut-out: 0.4,27.3 2.575,27.3 2.575,24.625 0.4,24.625
  pour cut-out: 0.4,24.45 0.4,27.3
  pour cut-out: 5.8,26.525 5.8,30.475 3.4,30.475 3.4,26.525
  pour cut-out: 6.15,26.525 6.15,30.475 8.55,30.475 8.55,26.525
  pour cut-out: 19.625,15.6 21.975,15.6 21.975,13.625 19.625,13.625
  pour cut-out: 15.65,13.1 15.65,15.625 18.75,15.625 18.75,13.1
  pour cut-out: 15.65,13.1
  pour cut-out: 12.35,17.575 12.35,13.625 14.775,13.625 14.775,17.575
  pour cut-out: -15.2,15.6 -12.85,15.6 -12.85,13.625 -15.2,13.625
  pour cut-out: -15.125,16
  pour cut-out: -18.325,15.6 -18.325,17.35 -16.025,17.35 -16.025,15.6
  pour cut-out: -26.25,4.15 -23.325,4.15 -23.325,3.3 -26.275,3.3
  pour cut-out: -18.775,5.6 -14.825,5.6 -14.825,3.2 -18.775,3.2
  pour cut-out: -23.325,4.1 -19.375,4.1 -19.375,1.7 -23.325,1.7
  pour cut-out: -23.325,-1.3
  pour cut-out: -23.325,-4.3 -23.325,-1.9 -19.375,-1.9 -19.375,-4.3
  pour cut-out: -18.775,-5.8 -18.775,-3.4 -14.825,-3.4 -14.825,-5.8
  pour cut-out: 19.975,6.825 19.975,9.175 17.7,9.175 17.7,6.825
  pour cut-out: 17.7,9.1
  pour cut-out: 17.6,9.1
  pour cut-out: 16.025,-6.8 19.975,-6.8 19.975,-9.2 16.025,-9.2
  pour cut-out: 2.225,-7.475 2.225,-12.525 -2.225,-12.525 -2.225,-7.475
  pour cut-out: 2.225,-12.85 2.25,-12.875 2.25,-17.9 -2.225,-17.9 -2.225,-12.85
  pour cut-out: -2.575,-7.45
  pour cut-out: -15.255,5.2 13.005,5.2 13.005,-6 -15.255,-6
Bottom Layer:
  pour cut-out: 16.025,15.325
  pour cut-out: 14.85,19.325 14.85,21.675 16.825,21.675 16.825,19.325
  pour cut-out: 16.85,15.325 14.875,15.325 14.875,17.675 16.85,17.675
  pour cut-out: 14.475,14.975 14.475,22.025 11.225,22.025 11.225,14.975
  pour cut-out: 2.375,11.975 4.75,11.975 4.75,10 2.375,10
  pour cut-out: -15.425,-7.525 -8.95,-7.525 -8.95,-15.125 -15.45,-15.125
  pour cut-out: -3.25,14.8 -3.25,21.25 3.25,21.25 3.25,14.8
  pour cut-out: 6.025,20.325 6.025,22.675 8,22.675 8,20.325
  pour cut-out: 4.675,24.025 2.375,24.025 2.375,26 4.675,26
  pour cut-out: -4.7,27.975 -2.3,27.975 -2.3,25.725 -4.7,25.725
  pour cut-out: -6.025,20.375 -8.3,20.375 -8.3,22.675 -6.025,22.675
  pour cut-out: -6.025,13.3 -8.275,13.3 -8.275,15.7 -6.025,15.7
  pour cut-out: 6.025,15.675 8.3,15.675 8.3,13.325 8.275,13.35 6.025,13.35
  pour cut-out: 7.975,8.05 5.5,8.05 5.5,12 7.975,12
  pour cut-out: 2.375,11.975
  pour cut-out: -4.675,11.975 -2.375,11.975 -2.375,9.7 -4.675,9.7
  pour cut-out: -15.425,-9.925 -19.375,-9.925 -19.375,-7.525 -15.425,-7.525
  pour cut-out: -19.375,-12.475 -19.375,-10.075 -15.425,-10.075 -15.425,-12.475

## Silkscreen, mask and mechanical layers (free items; w line width, h text height)
Bottom Overlay:
  pour cut-out: 16.025,15.325
Mechanical 2:
  the board outline again, w0.254